# EAGLE board Plant Pulse - An Arduino Based garden Monitoring System (EAGLE 9.7.0)

Size 375.8 x 185.34 mm. Coordinates in mm from the lower left corner, seen from the top.
Outline: 0,0 375.8,0 375.8,185.34 0,185.34 0,0
Copper layers (1*16): Top 0.035mm / dielectric 1.5mm / Bottom 0.035mm
Design rules "default": minimum track width 6mil, minimum drill 0.35mm, track to track 6mil, track to pad 6mil, pad to pad 6mil, via to via 6mil, smd to smd 6mil, copper to edge 40mil, drill to drill 6mil, minimum pad ring 10mil, minimum via ring 8mil, stop-mask expansion 4mil, vias tented up to drill 0mil, thermal gap 10mil

## Footprints (pad centres in the part's own frame; a part is rotated, then mirrored left to right if it is on the bottom)
BATTERY-GENERIC = drill 1.118 pad 3.15 octagon: + 2.54,0; - -2.54,0
LEDRD254W60D565H860B = drill 0.981 pad 1.581: 1 -1.27,0; 2 1.27,0
DIODE-AXIAL = drill 1: 1 -5.08,0; 2 5.08,0
KS2E-M-DC5 = drill 0.8: 1 -8.89,-3.81; 4 -1.27,-3.81; 6 3.81,-3.81; 8 8.89,-3.81; 9 8.89,3.81; 11 3.81,3.81; 13 -1.27,3.81; 16 -8.89,3.81
MOTOR = drill 1.118 pad 3.15 octagon: + 2.54,0; - -2.54,0
28027 = drill 1.016 long: 1 -2.54,0; 2 0,0; 3 2.54,0
RESAD1016W63L850D250B = drill 0.83 pad 1.43: 1 -5.08,0; 2 5.08,0
HA-06-SM065 = drill 1 pad 1.676: 1 -2.54,-2.54; 2 0,2.54; 3 2.54,-2.54
SEN-13322 = drill 1.016 long: 1 -2.54,0; 2 0,0; 3 2.54,0
TO92 = drill 0.813 octagon: 1 -1.27,0; 2 0,1.905; 3 1.27,0
ARDUINO-UNO-R3-SHIELD = drill 1.016 pad 1.88: 3.3V 24.13,-2.54; 5V 24.13,0; A0 24.13,12.7; A1 24.13,15.24; A2 24.13,17.78; A3 24.13,20.32; A4 24.13,22.86; A5 24.13,25.4; AREF -24.13,-13.97; D2 -24.13,20.32; D3 -24.13,17.78; D4 -24.13,15.24; D5 -24.13,12.7; D6 -24.13,10.16; D7 -24.13,7.62; D8 -24.13,3.81; D9 -24.13,1.27; D10 -24.13,-1.27; D11 -24.13,-3.81; D12 -24.13,-6.35; D13 -24.13,-8.89; GND@0 24.13,2.54; GND@1 24.13,5.08; GND@2 -24.13,-11.43; IOREF 24.13,-7.62; NC 24.13,-10.16; RES 24.13,-5.08; RX -24.13,25.4; SCL -24.13,-19.05; SDA -24.13,-16.51; TX -24.13,22.86; VIN 24.13,7.62
JHD-162A = drill 1.016 long: 1 -19.05,0; 2 -16.51,0; 3 -13.97,0; 4 -11.43,0; 5 -8.89,0; 6 -6.35,0; 7 -3.81,0; 8 -1.27,0; 9 1.27,0; 10 3.81,0; 11 6.35,0; 12 8.89,0; 13 11.43,0; 14 13.97,0; 15 16.51,0; 16 19.05,0

## Placement (x,y rotation side)
BAT1  9V  [BATTERY-GENERIC]  366.08,159.94 270 top
D1  RED  [LEDRD254W60D565H860B]  261.81,110.83 270 top
D4  DIODEDIODE-AXIAL  [DIODE-AXIAL]  228.02,147.18 0 top
K2  RELAY-DPDT_KS2E  [KS2E-M-DC5]  246.73,146.74 0 top
M1  MOTOR_HDR  [MOTOR]  252.72,177.08 0 top
PIR2  PIR-SENSOR_28027  [28027]  329.52,119.55 270 top
R1  220  [RESAD1016W63L850D250B]  230.53,111.74 0 top
R2  220  [RESAD1016W63L850D250B]  274.35,53.32 270 top
R4  1k  [RESAD1016W63L850D250B]  184.39,129.49 0 top
RPOT1  250k  [HA-06-SM065]  171.69,78.69 90 top
RPOT2  250k  [HA-06-SM065]  7.05,143.22 0 top
SEN1  SEN-13322  [SEN-13322]  368.18,78.14 90 top
T1  NPN  [TO92]  221.18,129.49 270 top
U1  ARDUINO-UNO-R3-SHIELD  [ARDUINO-UNO-R3-SHIELD]  96.11,97.39 180 top
U2  LCD-16X2JHD-162A  [JHD-162A]  257.65,36.63 0 top
U4  TMP36GT9Z_TO92  [TO92]  29.91,143.22 0 top

## Library data of the parts
BAT1 D4 K2 M1 PIR2 R1 R2 R4 RPOT1 RPOT2 SEN1 U1 U2 U4 = Tinkercad
D1 = Tinkercad; CATEGORY: Opto-Electronic; SUB-CATEGORY: LED; VALUE: LED_RED
T1 = Tinkercad; CATEGORY: Transistor; SUB-CATEGORY: BJT; TYPE: NPN

## Nets
BAT1+: BAT1.+ K2.11
BAT1-: BAT1.- D1.2 M1.- PIR2.3 RPOT1.3 RPOT2.3 SEN1.2 T1.3 U1.GND@0 U1.GND@1 U1.GND@2 U2.1 U2.5 U2.16 U4.1
D1_A: D1.1 R1.2
M1_+: K2.13 M1.+
T1_B: R4.2 T1.2
T1_C: D4.1 K2.16 T1.1
U1_5V: D4.2 K2.1 PIR2.2 R2.1 RPOT1.1 RPOT2.1 SEN1.1 U1.5V U2.2 U4.3
U1_A0: SEN1.3 U1.A0
U1_A1: U1.A1 U4.2
U1_A2: RPOT2.2 U1.A2
U1_D2: U1.D2 U2.14
U1_D3: U1.D3 U2.13
U1_D4: U1.D4 U2.12
U1_D5: U1.D5 U2.11
U1_D6: R1.1 U1.D6
U1_D8: PIR2.1 U1.D8
U1_D11: U1.D11 U2.6
U1_D12: U1.D12 U2.4
U1_D13: R4.1 U1.D13
U2_LED+: R2.2 U2.15
U2_VO: RPOT1.2 U2.3

## Tracks (layer width: path | path; a pad name or v marks a point on that pad's centre or on a via)
BAT1+  (1 unrouted)
BAT1-  (14 unrouted)
D1_A  (1 unrouted)
M1_+  (1 unrouted)
T1_B  (1 unrouted)
T1_C  (2 unrouted)
U1_5V  (9 unrouted)
U1_A0  (1 unrouted)
U1_A1  (1 unrouted)
U1_A2  (1 unrouted)
U1_D2  (1 unrouted)
U1_D3  (1 unrouted)
U1_D4  (1 unrouted)
U1_D5  (1 unrouted)
U1_D6  (1 unrouted)
U1_D8  (1 unrouted)
U1_D11  (1 unrouted)
U1_D12  (1 unrouted)
U1_D13  (1 unrouted)
U2_LED+  (1 unrouted)
U2_VO  (1 unrouted)